# Allegro board quintic_qn9020.brd
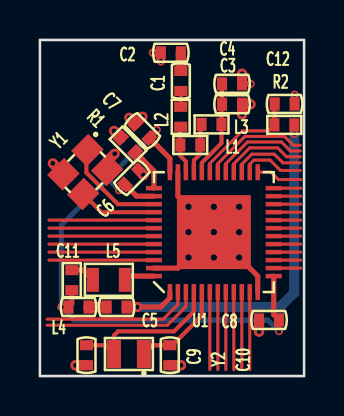
[diagram p0: board, top side]
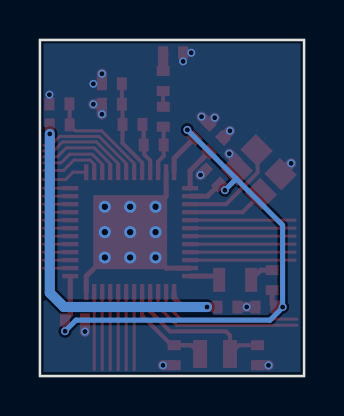
[diagram p1: board, bottom side, seen from below]

Outline 13.23 x 16.82 mm; copper layers: TOP, BOTTOM. Coordinates in mm from the lower left corner of the outline.
Outline path: 0,16.82 0,0 13.23,0 13.23,16.82 0,16.82

## Placement (name value [footprint] x y rotation side)
C1  1.5pF  [Q_C0402_N]  7.06 14.77 90 top
C2  1.0pF  [Q_C0402_N]  6.56 16.18 180 top
C3  2.2nF  [Q_C0402_N]  9.63 13.6 180 top
C4  8.2pF  [Q_C0402_N]  9.63 14.62 180 top
C5  100nF  [Q_C0402_N]  3.84 3.45 180 top
C6  100nF  [Q_C0402_N]  4.61 9.94 45 top
C7  100nF  [Q_C0402_N]  5.13 12.27 135 top
C8  100nF  [Q_C0402_N]  11.47 2.81 180 top
C9  22pF  [Q_C0402_N]  2.33 1.04 90 top
C10  22pF  [Q_C0402_N]  6.5 1.04 90 top
C11  1uF  [Q_C0402_N]  1.93 3.45 0 top
C12  1uF  [Q_C0402_N]  12.25 13.62 0 top
L1  1.3nH  [Q_R0402_N]  7.53 11.56 180 top
L2  2.0nH  [Q_R0402_N]  7.05 12.97 90 top
L3  6.2nH  [Q_R0402_N]  8.59 12.59 180 top
L4  15nH  [Q_R0402_N]  1.6 4.8 90 top
L5  10uH  [Q_0805]  3.45 4.81 0 top
R1  56K  [Q_R0402_N]  4.41 11.56 135 top
R2  100K  [Q_R0402_N]  12.24 12.57 0 top
U1  QN9020  [Q_QFN48]  8.71 7.2 90 top
Y1  16M  [Q_CCRY_SMD_2520]  2.27 10.2 225 top
Y2  32.768KHz  [Q_CCRY_SMD_2012]  5.21 1.1 180 top

## Library data of the parts
C1-C12 = CAPACITOR NON-POL
L1-L5 = INDUCTOR
R1 R2 = RESISTOR
U1 = QN9020_48_N_1
Y1 = CRYOSC_0
Y2 = CRYSTAL

## Footprints (pads in the part's own frame, mm; a bottom-side part is the same pattern mirrored in y, then rotated)
Q_0805
  rect 0.6x1.2 smd: 1(-0.8,0) 2(0.8,0)
Q_C0402_N
  rect 0.5x0.65 smd: 1(-0.5,0) 2(0.5,0)
Q_CCRY_SMD_2012
  rect 0.7x1.4 smd: 1(0,0) 2(1.5,0)
Q_CCRY_SMD_2520
  rect 1.2x1.1 smd: 1(-0.85,-0.7) 2(0.85,-0.7) 3(0.85,0.7) 4(-0.85,0.7)
Q_QFN48
  rect 0.8x0.22 smd: 1(-3,2.2) 2(-3,1.8) 3(-3,1.4) 4(-3,1) 5(-3,0.6) 6(-3,0.2) 7(-3,-0.2) 8(-3,-0.6) 9(-3,-1) 10(-3,-1.4) 11(-3,-1.8) 12(-3,-2.2) 25(3,-2.2) 26(3,-1.8) 27(3,-1.4) 28(3,-1) 29(3,-0.6) 30(3,-0.2) 31(3,0.2) 32(3,0.6) 33(3,1) 34(3,1.4) 35(3,1.8) 36(3,2.2)
  rect 0.22x0.8 smd: 13(-2.2,-3) 14(-1.8,-3) 15(-1.4,-3) 16(-1,-3) 17(-0.6,-3) 18(-0.2,-3) 19(0.2,-3) 20(0.6,-3) 21(1,-3) 22(1.4,-3) 23(1.8,-3) 24(2.2,-3) 37(2.2,3) 38(1.8,3) 39(1.4,3) 40(1,3) 41(0.6,3) 42(0.2,3) 43(-0.2,3) 44(-0.6,3) 45(-1,3) 46(-1.4,3) 47(-1.8,3) 48(-2.2,3)
  rect 3.7x3.7 smd: 49(0,0)
Q_R0402_N
  rect 0.5x0.65 smd: 1(-0.5,0) 2(0.5,0)

## Nets
GND: C2.2 C3.1 C4.1 C5.2 C6.2 C7.2 C8.2 C9.1 C10.1 C11.2 C12.2 R1.2 U1.12(VSS1) U1.35(VSS2) U1.47(VSS3) U1.49(VSS) Y1.2 Y1.4
VCC: C5.1 R2.2 U1.1(VCC)
ANT: C1.2 C2.1
P0_0: U1.11(P0_0)
P0_1: U1.10(P0_1)
P0_2: U1.9(P0_2)
P0_3: U1.8(P0_3)
P0_4: U1.7(P0_4)
P0_5: U1.6(P0_5)
P0_6: U1.3(P0_6)
P0_7: U1.2(P0_7)
P1_0: U1.21(P1_0)
P1_1: U1.20(P1_1)
P1_2: U1.19(P1_2)
P1_3: U1.18(P1_3)
P1_4: U1.17(P1_4)
P1_5: U1.16(P1_5)
P1_6: U1.15(P1_6)
P1_7: U1.14(P1_7)
P2_0: U1.29(P2_0)
P2_1: U1.28(P2_1)
P2_2: U1.27(P2_2)
P2_3: U1.26(P2_3)
P2_4: U1.25(P2_4)
P2_5: U1.24(P2_5)
P2_6: U1.23(P2_6)
P2_7: U1.22(P2_7)
P3_1: U1.46(P3_1)
P3_2: U1.45(P3_2)
P3_3: U1.44(P3_3)
P3_4: U1.43(P3_4)
P3_5: U1.42(P3_5)
P3_6: U1.41(P3_6)
P3_7: U1.30(P3_7)
QN_RST: C12.1 R2.1 U1.31(R\S\T\N\)
N1180320: C6.1 C7.1 C8.1 C11.1 L4.1 U1.13(VDD1) U1.36(VDD2) U1.38(VDD3)
N1180324: C9.2 U1.4(XTAL2_32K) Y2.2
N1180378: C10.2 U1.5(XTAL1_32K) Y2.1
N1180382: L5.2 U1.48(IDC)
N1180836: C3.2 C4.2 L3.1 U1.32(RVDD)
N1180912: L1.2 L2.1 U1.34(RFP)
N1180916: L1.1 L3.2 U1.33(RFN)
N1181020: C1.1 L2.2
N1181124: L4.2 L5.1
N1181216: R1.1 U1.37(REXT)
N1181274: U1.40(XTAL1) Y1.3
N1181278: U1.39(XTAL2) Y1.1

## Via types
v1: diameter 0.4, hole 0.25, TOP to BOTTOM, 23 vias
v2: diameter 0.61, hole 0.33, TOP to BOTTOM, 9 vias

## Routing (per net, layer and track width the routed paths; a pad name or vN(x,y) marks a point on that pad's centre or on a via; arc(x,y) is an arc through that point)
GND: length 20.7
  TOP w0.203: v1(12.75,14.08) C12.2
  TOP w0.254: v2(8.71,7.2) v2(7.44,8.47) 6.91,9 U1.35 ; v2(8.71,7.2) v2(7.44,5.93) 6.91,5.4 U1.47 ; v2(8.71,7.2) v2(9.98,5.93) 10.91,5 U1.12
  TOP w0.381: v1(5.65,16.18) C2.2 v1(6.06,15.75)
  TOP w0.508: Y1.2 1.18,10.11 v1(0.65,10.64) ; C11.2 2.87,3.45 v1(2.87,3.46) 2.88,3.45 C5.2 ; R1.2 4.06,11.92 v1(3.71,12.27) ; v1(3.74,11.13) 3.37,10.75 Y1.4 ; v1(1.78,0.54) 1.79,0.54 C9.1 ; v1(7.07,0.54) 7.06,0.54 C10.1 ; C3.1 v1(10.13,13.1) C3.1 ; C3.1 v1(10.55,13.6) ; v1(5.13,12.98) C7.2 v1(4.48,12.93) ; C4.1 v1(10.12,15.13) ; C8.2 v1(10.97,2.23) ; C6.2 5.19,10.06 v1(5.19,10.06)
  vias: v1(10.55,14.62) v2(7.44,7.2) v2(8.71,8.47) v2(8.71,5.93) v2(9.98,8.47) v2(9.98,7.2)
VCC: length 19.2
  TOP w0.254: R2.2 12.74,12.56 v1(12.74,12.12) ; U1.1 6.51,3.91 6.05,3.45 v1(4.86,3.45)
  TOP w0.508: C5.1 v1(4.86,3.45)
  BOTTOM w0.508: v1(4.86,3.45) 12.02,3.45 12.74,4.17 v1(12.74,12.12)
ANT: length 0.9
  TOP w0.508: C1.2 7.06,16.18 C2.1
P0_0: length 3.9
  TOP w0.152: U1.11 10.51,0.32
P0_1: length 3.9
  TOP w0.152: U1.10 10.11,0.32
P0_2: length 3.9
  TOP w0.152: U1.9 9.71,0.32
P0_3: length 3.9
  TOP w0.152: U1.8 9.31,0.32
P0_4: length 3.9
  TOP w0.152: U1.7 8.91,0.32
P0_5: length 3.9
  TOP w0.152: U1.6 8.51,0.32
P0_6: length 8.1
  TOP w0.152: U1.3 7.31,3.47 6.38,2.54 0.36,2.54
P0_7: length 7.5
  TOP w0.152: 0.36,2.85 6.18,2.85 6.91,3.58 U1.2
P1_0: length 1.4
  TOP w0.152: U1.21 13.06,8.2
P1_1: length 1.4
  TOP w0.152: U1.20 13.06,7.8
P1_2: length 1.4
  TOP w0.152: U1.19 13.06,7.4
P1_3: length 1.4
  TOP w0.152: U1.18 13.06,7
P1_4: length 1.4
  TOP w0.152: U1.17 13.06,6.6
P1_5: length 1.4
  TOP w0.152: U1.16 13.06,6.2
P1_6: length 1.4
  TOP w0.152: U1.15 13.06,5.8
P1_7: length 1.4
  TOP w0.152: U1.14 13.06,5.4
P2_0: length 4.8
  TOP w0.152: 13.03,11.27 12.54,11.27 12.47,11.33 12.09,11.71 10.39,11.71 9.31,10.63 U1.29
P2_1: length 4.3
  TOP w0.152: U1.28 9.71,10.62 10.51,11.42 11.9,11.42 12.35,10.97 13.03,10.97
P2_2: length 3.7
  TOP w0.152: 13.03,10.67 12.17,10.67 11.74,11.1 10.61,11.1 10.11,10.6 U1.27
P2_3: length 3.2
  TOP w0.152: 13.03,10.29 12.04,10.29 11.53,10.81 10.72,10.81 10.51,10.6 U1.26
P2_4: length 2.3
  TOP w0.152: 13.06,9.83 11.94,9.83 11.57,10.2 U1.25
P2_5: length 1.4
  TOP w0.152: U1.24 13.06,9.4
P2_6: length 1.4
  TOP w0.152: U1.23 13.06,9
P2_7: length 1.4
  TOP w0.152: U1.22 13.06,8.6
P3_1: length 5.3
  TOP w0.152: U1.46 0.45,5.8
P3_2: length 5.3
  TOP w0.152: U1.45 0.45,6.2
P3_3: length 5.3
  TOP w0.152: U1.44 0.45,6.6
P3_4: length 5.3
  TOP w0.152: U1.43 0.45,7
P3_5: length 5.3
  TOP w0.152: U1.42 0.45,7.4
P3_6: length 5.3
  TOP w0.152: U1.41 0.45,7.8
P3_7: length 5.3
  TOP w0.152: U1.30 8.91,10.63 10.27,11.99 12.25,11.99 12.69,11.55 13.03,11.55
QN_RST: length 5.5
  TOP w0.152: U1.31 8.51,10.64 10.14,12.27 11.44,12.27 R2.1
  TOP w0.203: C12.1 11.74,13.6 R2.1
N1180320: length 32
  TOP w0.254: C8.1 11.71,3.07 U1.13 ; C8.1 11.97,2.81 ; C8.1 11.97,2.81 ; v1(3.97,9.3) 4.26,9.59 4.84,9 U1.38 ; v1(1.07,3.45) C11.1 1.6,3.62 L4.1 ; 11.97,2.81 v1(11.97,2.24) ; U1.36 6.51,10.89 C7.1 5.85,12.28 v1(5.85,12.32)
  BOTTOM w0.254: v1(5.85,12.32) 3.4,9.87 ; 3.4,9.87 1.07,7.55 v1(1.07,3.45) 1.07,3.43 1.71,2.8 11.42,2.8 v1(11.97,2.24) ; 3.4,9.87 3.97,9.3 v1(3.97,9.3)
N1180324: length 8
  TOP w0.203: U1.4 7.71,3.23 6.72,2.24 3.91,2.24 3.71,2.03 Y2.2 3.27,1.54 C9.2
N1180378: length 5.7
  TOP w0.203: U1.5 8.11,3.02 6.63,1.54 5.65,1.54 ; C10.2 5.65,1.54 ; 5.65,1.54 Y2.1
N1180382: length 1.8
  TOP w0.254: 4.44,5 L5.2 4.44,5 ; 4.44,5 U1.48
N1180836: length 4.8
  TOP w0.203: U1.32 8.11,10.67 9.09,11.66 L3.1 9.09,13.57 C3.2 C4.2
N1180912: length 2.4
  TOP w0.203: L2.1 7.03,12.46 L1.2 7.03,11.02 7.31,10.74 U1.34
N1180916: length 3.6
  TOP w0.203: U1.33 7.71,10.79 8.01,11.09 8.01,11.54 ; 8.01,11.54 L1.1 ; 8.01,11.54 L1.1 ; L1.1 8.03,12.53 L3.2 8.03,12.53 L1.1
N1181020: length 0.8
  TOP w0.203: L2.2 7.06,13.48 C1.1
N1181124: length 1.3
  TOP w0.254: L5.1 2.17,5.3 L4.2
N1181216: length 2.8
  TOP w0.254: 5.17,10.8 5.71,10.27 U1.37 ; 5.17,10.8 R1.1 ; 5.17,10.8 5.17,10.8 4.77,11.21
N1181274: length 3.9
  TOP w0.203: Y1.3 3.07,8.2 U1.40
N1181278: length 5.2
  TOP w0.203: Y1.1 2.33,11.25 2.33,10.18 3.91,8.6 U1.39

## Copper pours and planes (outline as drawn; the poured copper is in the pictures)
GND on BOTTOM: 0.18,16.65 0.18,0.19 13.05,0.19 13.05,16.65
